# Altium PCB Hydrophones_0.1in_Adapter.PcbDoc
Units mil, origin at the board's own origin, x right, y up, seen from the top; angles counter-clockwise.
Board outline 625 x 925 mil, 2 copper layers (Top Layer, Bottom Layer), stack 62.8 mil thick; 3 components, 14 nets, 42 pads, 0 vias.
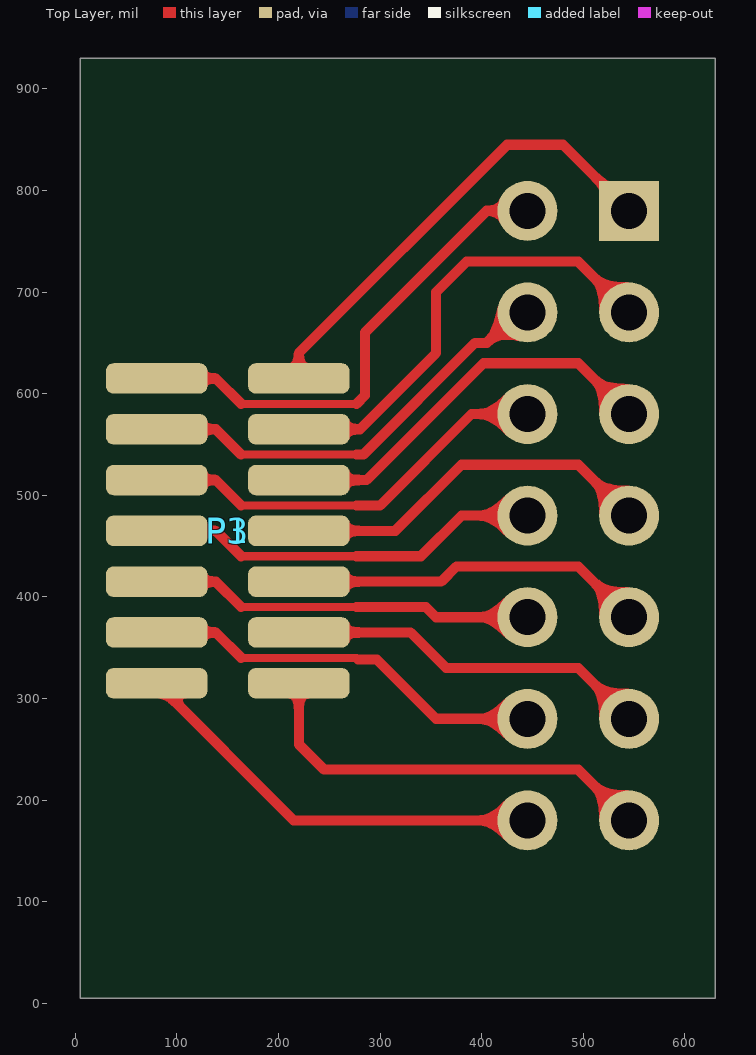
[diagram p0: Top Layer view]
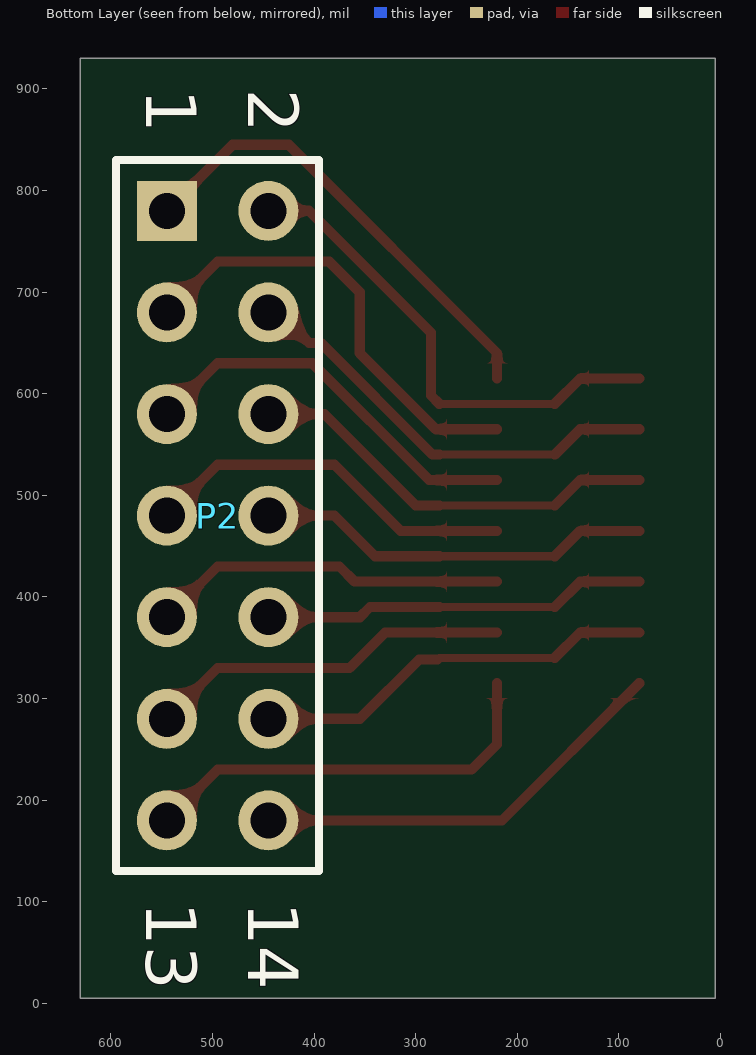
[diagram p1: Bottom Layer view, seen from below]

## Layer stack, top to bottom
Top Solder: solder mask 0.4, Solder Resist, Dk 3.5
Top Layer: signal copper 1.4
Dielectric 1: dielectric 60, FR-4, Dk 4.8
Bottom Layer: signal copper 1.4
Bottom Solder: solder mask 0.4, Solder Resist, Dk 3.5

## Board outline
5,5 5,930 630,930 630,5

## Design rules (kind name [scope] priority, off if disabled: settings)
Clearance [All] p1: gap=6 ignorepadtopadclearanceinfootprint=FALSE except(0: Arc-Hole Track-Hole SMDPad-Hole THPad-Hole Via-Hole Fill-Hole Poly-Hole Region-Hole Text-Hole)
PolygonConnect [All] p1: connectstyle=Relief reliefconductorwidth=10 reliefentries=4 polygonreliefangle="90 Angle" airgapwidth=10
RoutingVias [All] p1: holewidth=28 width=50 viastyle="Through Hole" minholewidth=28 minwidth=50 maxholewidth=28 maxwidth=50
SolderMaskExpansion [All] p1: expansion=4
Width [All] p1: maxlimit=10 minlimit=6 preferedwidth=10 minimp=50.000000 maximp=50.000000 favimp=50.000000
30 further rules are at their usual default settings.

## Components (designator, comment, footprint, x,y, rotation, side; value= is the part's Value field where it differs from the comment)
P1 "Header 7X2" FTSH-107-01-F-DV 150,465 r90 top
P2 "Header 7X2" HDR2X7 545,780 r270 bottom
P3 "Header 7X2" FTSH-107-01-F-DV 150,465 r90 top

## Footprints (in the part's own frame and the unit in brackets; to place one, negate y for a bottom-side part, rotate by r counter-clockwise, add the part's x,y. Pads: shape width x height; smd on the part's side, far side on the other; paste and mask are expansions set on the pad)
FTSH-107-01-F-DV [mil]
  rrect50% 30x100 smd: 1(150,70) 2(150,-70) 3(100,70) 4(100,-70) 5(50,70) 6(50,-70) 7(0,70) 8(0,-70) 9(-50,70) 10(-50,-70) 11(-100,70) 12(-100,-70) 13(-150,70) 14(-150,-70)
  body extent -175,-115 175,115, height 274
HDR2X7 [mm] "Connector; Header; 7x2 Position"
  rect 1.5x1.5 hole 0.9: 1(0,0)
  round 1.5 hole 0.9: 2(0,2.54) 3(2.54,0) 4(2.54,2.54) 5(5.08,0) 6(5.08,2.54) 7(7.62,0) 8(7.62,2.54) 9(10.16,0) 10(10.16,2.54) 11(12.7,0) 12(12.7,2.54) 13(15.24,0) 14(15.24,2.54)
  silkscreen extent -1.27,-1.27 16.51,3.81

## Part data
P1 P2 P3: "Header, 7-Pin, Dual row", LatestRevisionDate=17-Jul-2002, LatestRevisionNote="Re-released for DXP Platform.", Publisher="Altium Limited"

## Nets (pads, with @x,y where several pads share a name; then routed paths per layer and width w, separated by ;. In a path a pad name is that pad's centre, name@x,y a point inside that pad or via, vN(x,y) a via of type N, cw(c..) or ccw(c..) an arc to the next point about the centre after c; other vN are vias at no path point)
NetP1_1: P1.1 P2.2 P3.1 | length 490.3
  Top Layer w8: 163.18,590 276.82,590
  Top Layer w10: P1.1 138.18,615 163.18,590 ; 276.82,590 285,598.18 285,660 405,780 P2.2
NetP1_2: P1.2 P2.1 P3.2 | length 461.8
  Top Layer w10: P1.2 220,640 425,845 480,845 P2.1
NetP1_3: P1.3 P2.4 P3.3 | length 433.3
  Top Layer w8: 163.18,540 276.82,540
  Top Layer w10: P1.3 138.18,565 163.18,540 ; 276.82,540 283.39,540 393.39,650 405,650 435,680 P2.4
NetP1_4: P1.4 P2.3 P3.4 | length 449.3
  Top Layer w10: P1.4 280.1,565 355,639.9 355,700 385,730 495,730 P2.3
NetP1_5: P1.5 P2.6 P3.5 | length 412.6
  Top Layer w8: 163.18,490 276.82,490
  Top Layer w10: P1.5 138.18,515 163.18,490 ; 276.82,490 299.96,490 389.96,580 P2.6
NetP1_6: P1.6 P2.5 P3.6 | length 393.3
  Top Layer w10: P1.6 286.67,515 401.67,630 495,630 P2.5
NetP1_7: P1.7 P2.8 P3.7 | length 391.9
  Top Layer w8: 163.18,440 276.82,440
  Top Layer w10: P1.7 138.18,465 163.18,440 ; 276.82,440 340,440 380,480 P2.8
NetP1_8: P1.8 P2.7 P3.8 | length 372.6
  Top Layer w10: P1.8 315,465 380,530 495,530 P2.7
NetP1_9: P1.9 P2.10 P3.9 | length 379.5
  Top Layer w8: 163.18,390 276.82,390
  Top Layer w10: P1.9 138.18,415 163.18,390 ; 276.82,390 345,390 355,380 P2.10
NetP1_10: P1.10 P2.9 P3.10 | length 351.9
  Top Layer w10: P1.10 360,415 375,430 495,430 P2.9
NetP1_11: P1.11 P2.12 P3.11 | length 400.2
  Top Layer w8: 163.18,340 276.82,340 278.41,338.41
  Top Layer w10: P1.11 138.18,365 163.18,340 ; 278.41,338.41 296.59,338.41 355,280 P2.12
NetP1_12: P1.12 P2.11 P3.12 | length 360.2
  Top Layer w10: P1.12 330,365 365,330 495,330 P2.11
NetP1_13: P1.13 P2.14 P3.13 | length 420.9
  Top Layer w10: P1.13 215,180 P2.14
NetP1_14: P1.14 P2.13 P3.14 | length 416.1
  Top Layer w10: P1.14 220,255 245,230 495,230 P2.13

## Silkscreen, mask and mechanical layers (free items; w line width, h text height)
Mechanical 1:
  the board outline again, w10
Mechanical 2:
  the board outline again, w10

## Text inside footprints (layer, text, board x,y; h text height)
P2: Bottom Overlay "2" at 465,900 h50 r90; Bottom Overlay "1" at 565,900 h50 r90; Bottom Overlay "14" at 465,100 h50 r90; Bottom Overlay "13" at 565,100 h50 r90